# Altium PCB MSXII_Controller_Breakout.PcbDoc
Units mil, origin at the board's own origin, x right, y up, seen from the top; angles counter-clockwise.
Board outline 1377.95 x 1181.1 mil, 2 copper layers (Top Layer, Bottom Layer), stack 12.8 mil thick; 4 components, 32 nets, 109 pads, 20 vias.
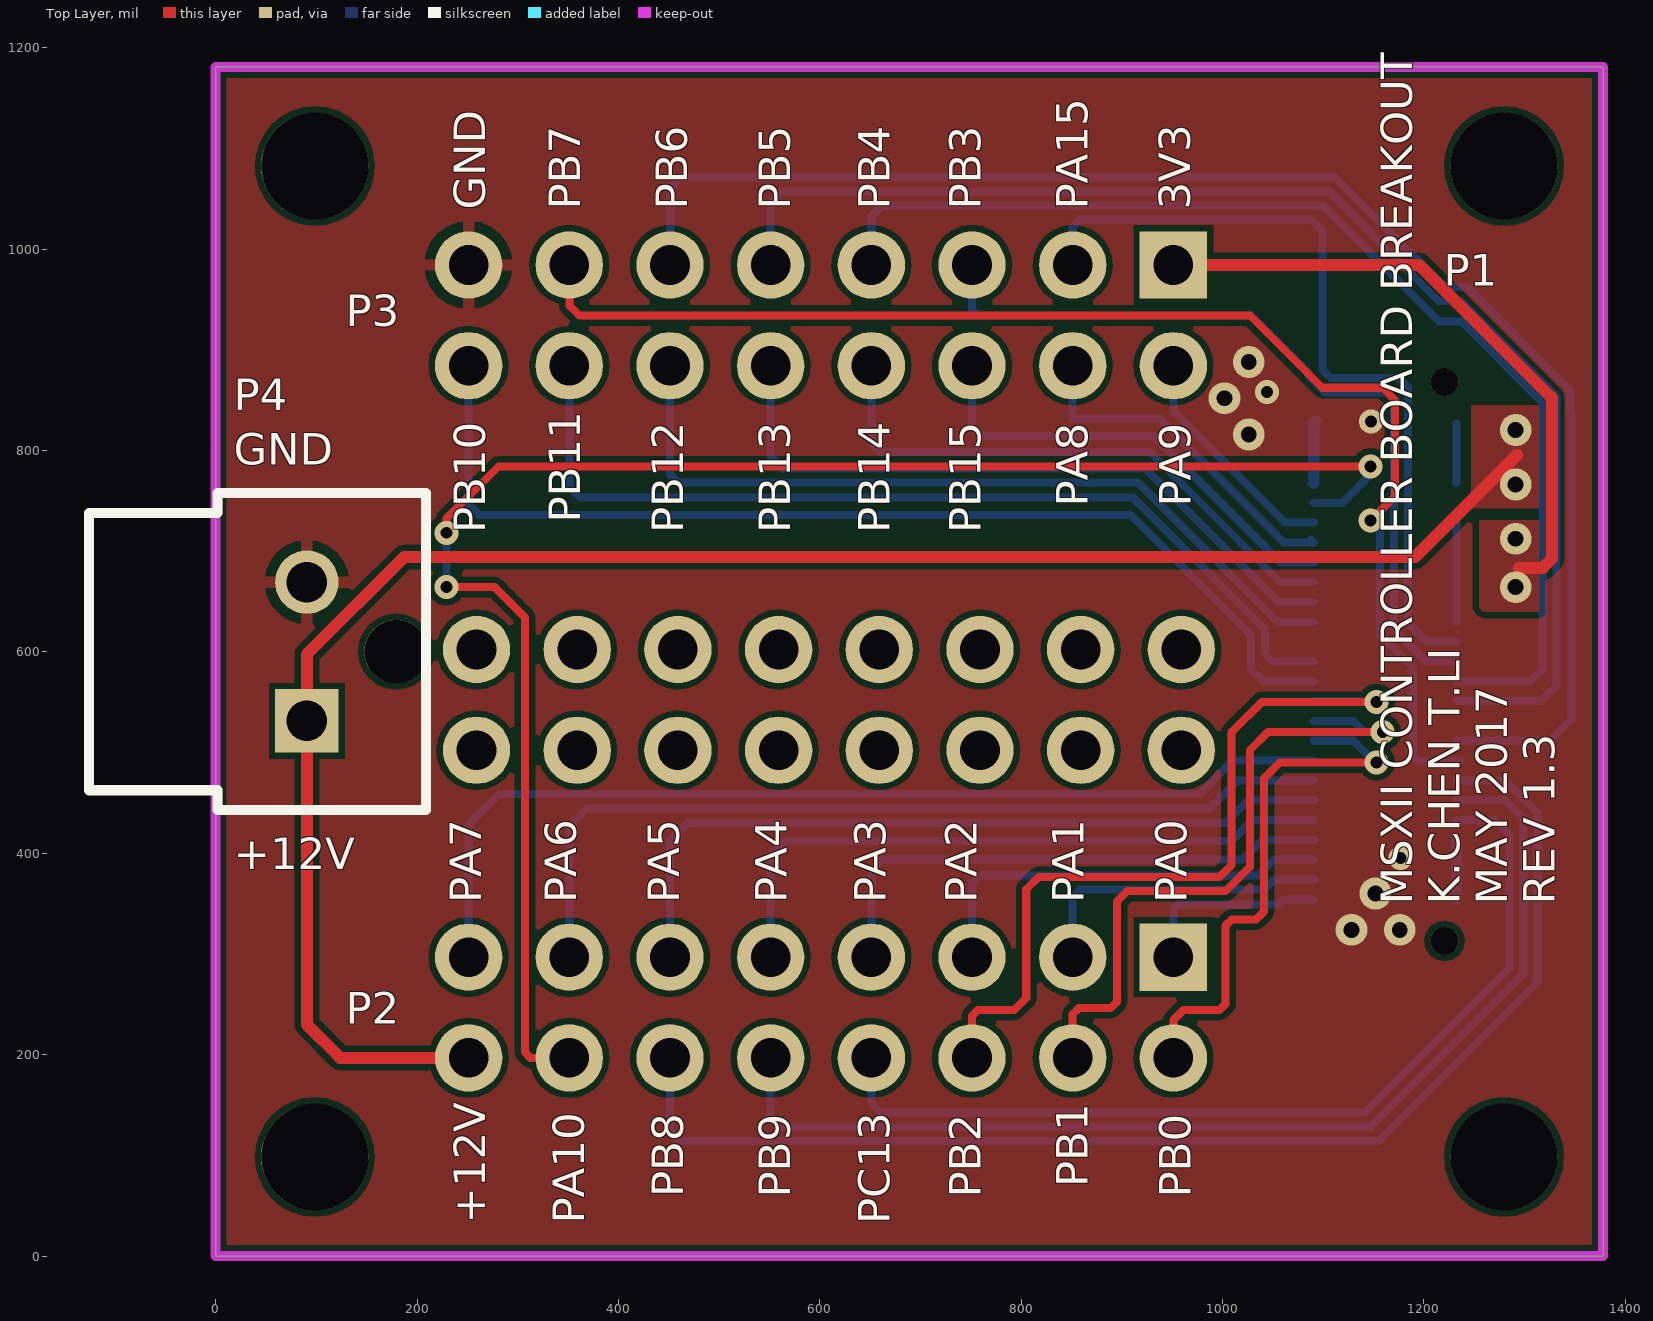
[diagram p0: Top Layer view]
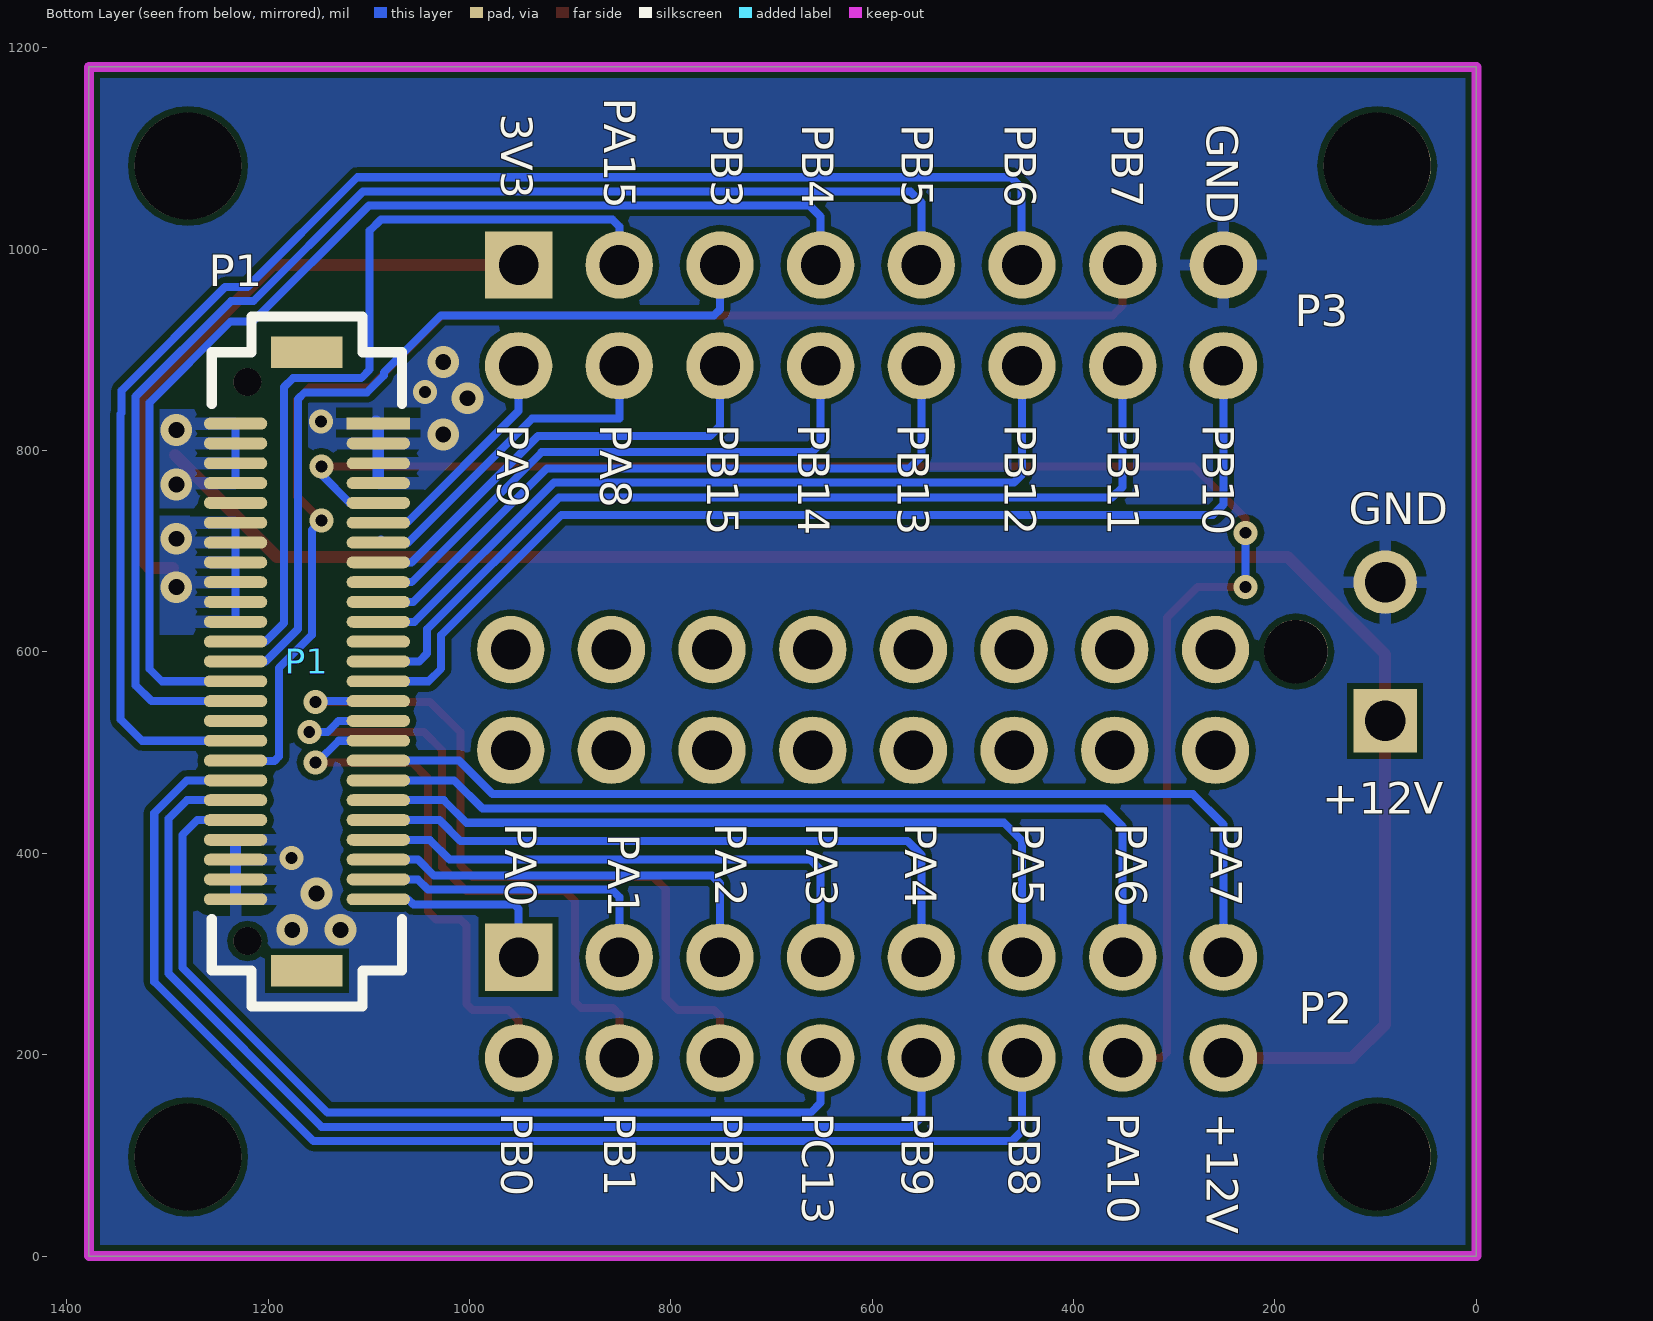
[diagram p1: Bottom Layer view, seen from below]

## Layer stack, top to bottom
Top Solder: solder mask 0.4, Solder Resist, Dk 3.5
Top Layer: signal copper 1.4
Dielectric 1: core 10, FR-4, Dk 4.2
Bottom Layer: signal copper 1.4
Bottom Solder: solder mask 0.4, Solder Resist, Dk 3.5

## Board outline
0,0 1377.95,0 1377.95,1181.1 0,1181.1

## Design rules (kind name [scope] priority, off if disabled: settings)
Clearance [All] p1: gap=6
HoleSize [All] p1: absolutevalues=TRUE maxlimit=200 minlimit=1 maxpercent=80.000 minpercent=20.000
PolygonConnect 3V3_Via_PolygonConnect [IsVia vs InNet('3V3')] p1: connectstyle=Direct reliefconductorwidth=11.81 reliefentries=4 polygonreliefangle="90 Angle" airgapwidth=10
PolygonConnect 12V_Via_PolygonConnect [IsVia vs InNet('+12V')] p2: connectstyle=Direct reliefconductorwidth=11.81 reliefentries=4 polygonreliefangle="90 Angle" airgapwidth=10
PolygonConnect GND_Via_PolygonConnect [IsVia vs InNet('GND')] p3: connectstyle=Direct reliefconductorwidth=11.81 reliefentries=4 polygonreliefangle="90 Angle" airgapwidth=10
PolygonConnect 3V3_Header_PolygonConnect [HasFootprint('CONN HEADER 8POS .100" SNGL SMD') vs InNet('3V3')] p4: connectstyle=Direct reliefconductorwidth=11.81 reliefentries=4 polygonreliefangle="90 Angle" airgapwidth=10
PolygonConnect [All] p5: connectstyle=Relief reliefconductorwidth=11.81 reliefentries=4 polygonreliefangle="90 Angle" airgapwidth=10
RoutingVias [All] p1: holewidth=11.81 width=23.81 viastyle="Through Hole" minholewidth=11.81 minwidth=23.81 maxholewidth=200 maxwidth=200
SolderMaskExpansion [All] p1: expansion=4
Width [All] p1: maxlimit=100 minlimit=6 preferedwidth=8 minimp=50.000000 maximp=50.000000 favimp=50.000000
29 further rules are at their usual default settings.

## Classes and differential pairs
component class Controller_Board_Interface: P1
component class MSXII_Controller_Breakout: P2 P3 P4

## Components (designator, comment, footprint, x,y, rotation, side; value= is the part's Value field where it differs from the comment)
P1 "BergStak Plug" "Bergstak 50 Pos Plug" 1161.42,590.55 r180 bottom locked
P2 "16POS" "16POS 0.100\" HEADER" 951.18,296.85 r180 top
P3 "16POS" "16POS 0.100\" HEADER" 951.18,984.25 r180 top
P4 "2 Position Ultra-Fit Connector" WM11673-ND 90.55,531.5 r90 top

## Footprints (in the part's own frame and the unit in brackets; to place one, negate y for a bottom-side part, rotate by r counter-clockwise, add the part's x,y. Pads: shape width x height; smd on the part's side, far side on the other; paste and mask are expansions set on the pad)
"16POS 0.100\" HEADER" [mm]
  rect 1.7x1.7 hole 1: 1(0,0)
  round 1.7 hole 1: 2(2.54,0) 3(5.08,0) 4(7.62,0) 5(10.16,0) 6(12.7,0) 7(15.24,0) 8(17.78,0) 9(17.78,2.54) 10(15.24,2.54) 11(12.7,2.54) 12(10.16,2.54) 13(7.62,2.54) 14(5.08,2.54) 15(2.54,2.54) 16(0,2.54)
"Bergstak 50 Pos Plug" [mm] "Bergstak 50 Position Plug"
  rect 1.6x0.3 smd: 1(1.8,6)
  oval 1.6x0.3 smd: 2(1.8,5.5) 3(1.8,5) 4(1.8,4.5) 5(1.8,4) 6(1.8,3.5) 7(1.8,3) 8(1.8,2.5) 9(1.8,2) 10(1.8,1.5) 11(1.8,1) 12(1.8,0.5) 13(1.8,0) 14(1.8,-0.5) 15(1.8,-1) 16(1.8,-1.5) 17(1.8,-2) 18(1.8,-2.5) 19(1.8,-3) 20(1.8,-3.5) 21(1.8,-4) 22(1.8,-4.5) 23(1.8,-5) 24(1.8,-5.5) 25(1.8,-6) 26(-1.8,-6) 27(-1.8,-5.5) 28(-1.8,-5) 29(-1.8,-4.5) 30(-1.8,-4) 31(-1.8,-3.5) 32(-1.8,-3) 33(-1.8,-2.5) 34(-1.8,-2) 35(-1.8,-1.5) 36(-1.8,-1) 37(-1.8,-0.5) 38(-1.8,0) 39(-1.8,0.5) 40(-1.8,1) 41(-1.8,1.5) 42(-1.8,2) 43(-1.8,2.5) 44(-1.8,3) 45(-1.8,3.5) 46(-1.8,4) 47(-1.8,4.5) 48(-1.8,5) 49(-1.8,5.5) 50(-1.8,6)
  round 0.7 hole 0.7: ""(-1.5,-7.05) ""(-1.5,7.05)
  rect 1.8x0.8 smd: ""(0,-7.8) ""(0,7.8)
  silkscreen extent -2.4,-8.7 2.4,8.7
WM11673-ND [mm] "2 Positions Header, Shrouded Connector 0.138\" (3.50mm) Through Hole Gold"
  rect 1.6x1.6 hole 1.02: 1(0,0)
  round 1.6 hole 1.02: 2(3.5,0)
  round 1.6 hole 1.6: ""(1.75,-2.25)
  silkscreen extent -2.25,-3 5.75,5.5, body extent -2.71,-2.85 6.29,5.82, height 13.85

## Part data
P1: library part "BergStak 50 Position Connector Plug", "50 Position Connector Plug, Outer Shroud Contacts Surface Mount Gold"
P2 P3: library part "16Pos 0.100\" Header", "CONN HEADER .100\" DUAL STR 16POS"
P4: "2 Positions Header, Shrouded Connector 0.138\" (3.50mm) Through Hole Gold"

## Free pads (board coordinates)
  round 66.93 hole 39.37: 0(259.06,502.36) 0(259.06,602.36) 0(359.06,502.36) 0(359.06,602.36) 0(459.06,502.36) 0(459.06,602.36) 0(559.06,502.36) 0(559.06,602.36) 0(659.06,502.36) 0(659.06,602.36) 0(759.06,502.36) 0(759.06,602.36) 0(859.06,502.36) 0(859.06,602.36) 0(959.06,502.36) 0(959.06,602.36)
  round 106.3 hole 106.3: ""(98.43,98.43) ""(98.43,1082.68) ""(1279.53,98.43) ""(1279.53,1082.68)

## Via types
v1: diameter 23.82, hole 11.81, Top Layer to Bottom Layer, tented both sides, 10 vias
v2: diameter 31.5, hole 15.75, Top Layer to Bottom Layer, tented both sides, 10 vias

## Nets (pads, with @x,y where several pads share a name; then routed paths per layer and width w, separated by ;. In a path a pad name is that pad's centre, name@x,y a point inside that pad or via, vN(x,y) a via of type N, cw(c..) or ccw(c..) an arc to the next point about the centre after c; other vN are vias at no path point)
3V3: P1.40 P1.41 P1.42 P1.43 P1.44 P1.45 P3.1 | length 725.2
  Top Layer w12: P3.1 1195.28,984.25 1327.06,852.47 1327.06,692.41 1318.11,683.46 1294.49,683.46
  Bottom Layer w8: P1.40 P1.41 P1.42 P1.43 P1.44 P1.45
  other v2: 1291.06,664.36 1291.06,712.36
+12V: P1.47 P1.48 P1.49 P1.50 P2.9 P4.1 | length 1885
  Top Layer w12: P2.9 123.62,196.85 90.55,229.92 P4.1 90.55,597.64 187.28,694.36 1191.21,694.36 1292.43,795.57
  Bottom Layer w8: P1.47 P1.48 P1.49 P1.50
  other v2: 1291.06,766.36 1291.06,820.36
GND: P1.1 P1.2 P1.3 P1.4 P1.26 P1.27 P1.28 P1.29 P3.8 P4.2 | length 121.5
  Bottom Layer w11: P1.26 P1.27 P1.28 P1.29
  Bottom Layer w11.81: P1.4 P1.3 P1.2 P1.1 P1.1@1092.92,829.13
  other v1: 1176.82,395.18 1147.24,828.74 1044,858
  other v2: 1128,324 1176,324 1152,360 1026,816 1002,852 1026,888
PA0: P1.25 P2.1 | length 191.3
  Bottom Layer w8: P2.1 951.18,344.88 955.42,349.12 1055.64,349.12 1060.85,354.33 P1.25
PA1: P1.24 P2.2 | length 306.3
  Bottom Layer w8: P2.2 851.18,356.49 858.65,363.95 1041.23,363.95 1051.29,374.02 P1.24
PA2/USART2_TX: P1.23 P2.3 | length 422.4
  Bottom Layer w8: P2.3 751.18,370.08 759.06,377.95 1035.43,377.95 1051.18,393.7 P1.23
PA3/USART2_RX: P1.22 P2.4 | length 538.4
  Bottom Layer w8: P2.4 651.18,383.47 661.42,393.7 1019.68,393.7 1039.37,413.39 P1.22
PA4/SPI1_NSS: P1.21 P2.5 | length 655.3
  Bottom Layer w8: P2.5 551.18,398.49 565.06,412.36 1009.06,412.36 1029.76,433.07 P1.21
PA5/SPI1_SCK: P1.20 P2.6 | length 771.7
  Bottom Layer w8: P2.6 451.18,412.49 469.06,430.36 1003.06,430.36 1025.45,452.76 P1.20
PA6/SPI1_MISO: P1.19 P2.7 | length 888
  Bottom Layer w8: P2.7 351.18,426.49 369.06,444.36 987.06,444.36 1015.13,472.44 P1.19
PA7/SPI1_MOSI: P1.18 P2.8 | length 997.4
  Bottom Layer w8: P2.8 251.18,428.49 281.59,458.9 977.06,458.9 1010.29,492.13 P1.18
PA8: P1.7 P3.15 | length 347
  Bottom Layer w8: P3.15 851.18,831.74 937.68,831.74 1060.76,708.66 P1.7 P1.7@1087.65,711.57
PA9: P1.6 P3.16 | length 230.3
  Bottom Layer w8: P3.16 951.18,839.32 1062.15,728.35 P1.6
PA10: P1.5 P2.10 | length 1680.3
  Top Layer w8: v1(229.06,664.36) 277.06,664.36 307.06,634.36 307.06,202.36 312.57,196.85 P2.10 P2.10@378.74,196.85 ; v1(229.06,718.36) 229.06,732.36 281.06,784.36 v1(1147.06,784.36)
  Bottom Layer w8: v1(229.06,664.36) v1(229.06,718.36) ; P1.5 1118.95,748.03 1147.06,776.13 v1(1147.06,784.36)
PA15: P1.39 P3.2 | length 814
  Bottom Layer w8: P3.2 851.18,1022.49 858.13,1029.43 1087.98,1029.43 1099.06,1018.36 1099.06,880.36 1107.53,871.89 1175.35,871.89 1184.25,862.99 1184.25,628.63 1202.65,610.24 P1.39
PB0: P1.17 P2.16 | length 539.9
  Top Layer w8: P2.16 951.18,234.49 961.06,244.36 997.06,244.36 1003.06,250.36 1003.06,328.36 1009.06,334.36 1033.06,334.36 1041.06,342.36 1041.06,474.36 1057.06,490.36 v1(1153.06,490.36)
  Bottom Layer w8: P1.17 1129.81,511.81 1151.26,490.36 v1(1153.06,490.36)
PB1: P1.16 P2.15 | length 666.7
  Top Layer w8: P2.15 851.18,240.16 857.48,246.46 888.98,246.46 895.06,252.54 895.06,352.36 905.06,362.36 1002.85,362.36 1027.06,386.56 1027.06,502.36 1045.06,520.36 v1(1159.06,520.36)
  Bottom Layer w8: P1.16 1129.92,531.5 1132.71,528.71 1138.27,523.15 1141.06,520.36 v1(1159.06,520.36)
PB2: P1.15 P2.14 | length 776.1
  Top Layer w8: P2.14 751.18,238.49 757.06,244.36 793.06,244.36 805.06,256.36 805.06,364.36 817.06,376.36 997.06,376.36 1009.06,388.36 1009.06,520.36 1039.06,550.36 v1(1153.06,550.36)
  Bottom Layer w8: P1.15 1152.24,551.18 v1(1153.06,550.36)
PB3: P1.38 P3.3 | length 805.5
  Bottom Layer w8: P3.3 751.18,940.24 757.06,934.36 1028.35,934.36 1085.06,877.66 1085.06,874.56 1101.73,857.89 1163.53,857.89 1170.25,851.17 1170.25,622.83 1202.54,590.55 P1.38
PB4: P1.37 P3.4 | length 1155.4
  Bottom Layer w8: P3.4 651.18,1032.49 662.13,1043.43 1099.78,1043.43 1214.85,928.36 1237.06,928.36 1317.56,847.86 1317.56,582.87 1305.56,570.87 P1.37
PB5: P1.36 P3.5 | length 1324.1
  Bottom Layer w8: P3.5 551.18,1046.49 562.13,1057.43 1105.58,1057.43 1214.65,948.36 1236.85,948.36 1331.56,853.66 1331.56,566.87 1315.87,551.18 P1.36
PB6/USART1_TX: P1.34 P3.6 | length 1512.7
  Bottom Layer w8: P3.6 451.57,984.64 451.57,1060.88 462.13,1071.43 1111.38,1071.43 1220.45,962.36 1242.65,962.36 1345.56,859.46 1345.56,837.26 1346.46,836.36 1346.46,533.07 1325.19,511.81 P1.34
PB7/USART1_RX: P1.33 P3.7 | length 1328.7
  Top Layer w8: P3.7 351.18,944.24 361.06,934.36 1027.06,934.36 1099.06,862.36 1159.06,862.36 1171.06,850.36 1171.06,754.36 v1(1147.06,730.36)
  Bottom Layer w8: v1(1147.06,730.36) 1156.25,721.17 1156.25,617.03 1189.06,584.23 1189.06,496.36 1193.67,491.75 P1.33@1235.75,491.75
PB8/I2C1_SCL: P1.32 P2.11 | length 1266
  Bottom Layer w8: P2.11 451.18,124.24 461.06,114.36 1155.06,114.36 1313.06,272.36 1313.06,440.16 1280.78,472.44 P1.32
PB9/I2C1_SDA: P1.31 P2.12 | length 1101.8
  Bottom Layer w8: P2.12 551.18,138.24 561.06,128.36 1146.85,128.36 1299.06,280.56 1299.06,434.36 1280.66,452.76 P1.31
PB10/USART3_TX/I2C2_SCL: P1.14 P3.9 | length 1069.5
  Bottom Layer w8: P3.9 251.18,746.46 261.42,736.22 908.6,736.22 1028.06,616.76 1028.06,583.36 1040.55,570.87 P1.14
PB11/USART3_RX/I2C2_SDA: P1.13 P3.10 | length 945.7
  Bottom Layer w8: P3.10 351.18,763.94 361.65,753.46 911.15,753.46 1042.06,622.56 1042.06,598.36 1049.87,590.55 P1.13
PB12/SPI2_NSS: P1.11 P3.11 | length 808
  Bottom Layer w8: P3.11 451.18,776.21 459.03,768.36 916.06,768.36 1054.5,629.92 P1.11
PB13/SPI2_SCK: P1.10 P3.12 | length 689.3
  Bottom Layer w8: P3.12 551.18,794.29 563.11,782.36 923.06,782.36 1055.81,649.61 P1.10
PB14/SPI2_MISO: P1.9 P3.13 | length 573.7
  Bottom Layer w8: P3.13 651.18,806.89 659.71,798.36 928.26,798.36 1057.33,669.29 P1.9
PB15/SPI2_MOSI: P1.8 P3.14 | length 455.4
  Bottom Layer w8: P3.14 751.18,824.24 761.06,814.36 932.06,814.36 1057.44,688.98 P1.8
PC13: P1.30 P2.13 | length 933.1
  Bottom Layer w8: P2.13 651.18,152.24 661.06,142.36 1141.06,142.36 1285.06,286.36 1285.06,418.36 1270.35,433.07 P1.30
pads on no net: P1. P1.12 P1.35 P1.46 P4.

## Polygon pours and split planes (outlines as drawn)
3V3 on Top Layer "3V3_L01_P040" (solid, remove dead copper, pour order 40): 1255.12,730.71 1314.17,730.71 1314.17,640.16 1259.06,640.16 1255.12,644.09
+12V on Top Layer "+12V_L01_P034" (solid, remove dead copper, pour order 34): 1247.24,844.88 1314.17,844.88 1314.17,742.52 1247.24,742.52
GND on Top Layer "GND_L01_P042" (solid, remove dead copper, pour order 42): 7.09,1175.59 7.09,6.3 1373.23,6.3 1373.23,1175.59
3V3 on Bottom Layer "3V3_L02_P038" (solid, remove dead copper, pour order 38): 1186.14,735.04 1309.06,735.04 1309.06,616.93 1197.95,616.93 1186.14,628.74
+12V on Bottom Layer "+12V_L02_P036" (solid, remove dead copper, pour order 36): 1172.44,840.94 1172.44,742.52 1309.06,742.52 1309.06,840.94
GND on Bottom Layer "GND_L02_P044" (solid, remove dead copper, pour order 44): 7.09,1175.59 7.09,6.3 1373.23,6.3 1373.23,1175.59

## Keep-outs
Keep-Out Layer:
  lines w10: 0,0 0,1181.1 1377.9,1181.1 1378,1181 1378,0 0,0

## Silkscreen, mask and mechanical layers (free items; w line width, h text height)
Top Overlay:
  text "GND" at 267.72,1039.37 h31.5 r90
  text "PB7" at 362.2,1039.37 h31.5 r90
  text "PB6" at 468.5,1039.37 h31.5 r90
  text "PB5" at 570.87,1039.37 h31.5 r90
  text "PB4" at 669.29,1039.37 h31.5 r90
  text "PB3" at 759.84,1039.37 h31.5 r90
  text "PA15" at 866.14,1039.37 h31.5 r90
  text "3V3" at 967.72,1039.37 h31.5 r90
  text "GND" at 18,786 h31.5
  text "PA8" at 866.14,744.09 h31.5 r90
  text "PA9" at 968.5,744.09 h31.5 r90
  text "PB11" at 362.2,728.35 h31.5 r90
  text "PB10" at 267.72,717.86 h31.5 r90
  text "PB12" at 464.57,717.86 h31.5 r90
  text "PB13" at 570.87,717.86 h31.5 r90
  text "PB14" at 669.29,717.86 h31.5 r90
  text "PB15" at 759.84,717.86 h31.5 r90
  text "+12V" at 18,384 h31.5
  text "PA7" at 263.78,350.39 h31.5 r90
  text "PA6" at 358.27,350.39 h31.5 r90
  text "PA5" at 460.63,350.39 h31.5 r90
  text "PA4" at 566.93,350.39 h31.5 r90
  text "PA3" at 665.35,350.39 h31.5 r90
  text "PA2" at 755.91,350.39 h31.5 r90
  text "PA1" at 862.2,350.39 h31.5 r90
  text "PA0" at 964.57,350.39 h31.5 r90
  text "MSXII CONTROLLER BOARD BREAKOUT / K.CHEN T.LI / MAY 2017 / REV 1.3" at 1329.92,348.82 h31.5 r90
  text "PB1" at 866.14,68.23 h31.5 r90
  text "PB8" at 464.57,58.56 h31.5 r90
  text "PB9" at 570.87,57.73 h31.5 r90
  text "PB2" at 759.84,57.73 h31.5 r90
  text "PB0" at 968.5,57.73 h31.5 r90
  text "+12V" at 267.72,32.32 h31.5 r90
  text "PA10" at 366.14,32.32 h31.5 r90
  text "PC13" at 669.29,31.5 h31.5 r90
Bottom Overlay:
  text "PA15" at 866.14,1150.39 h31.5 r90
  text "3V3" at 968.5,1134.65 h31.5 r90
  text "GND" at 267.72,1124.16 h31.5 r90
  text "PB7" at 362.2,1124.16 h31.5 r90
  text "PB6" at 468.5,1124.16 h31.5 r90
  text "PB5" at 570.87,1124.16 h31.5 r90
  text "PB4" at 669.29,1124.16 h31.5 r90
  text "PB3" at 759.84,1124.16 h31.5 r90
  text "P1" at 1259.06,962.99 h31.5
  text "P3" at 180.31,923.62 h31.5
  text "PB10" at 271.65,826.24 h31.5 r90
  text "PB11" at 366.14,826.24 h31.5 r90
  text "PB12" at 468.5,826.24 h31.5 r90
  text "PB13" at 574.8,826.24 h31.5 r90
  text "PB14" at 673.23,826.24 h31.5 r90
  text "PB15" at 763.78,826.24 h31.5 r90
  text "PA8" at 870.08,826.24 h31.5 r90
  text "PA9" at 972.44,826.24 h31.5 r90
  text "GND" at 126.52,726.77 h31.5
  text "+12V" at 152.76,439.37 h31.5
  text "PA7" at 263.78,429.92 h31.5 r90
  text "PA6" at 358.27,429.92 h31.5 r90
  text "PA5" at 460.63,429.92 h31.5 r90
  text "PA4" at 566.93,429.92 h31.5 r90
  text "PA3" at 665.35,429.92 h31.5 r90
  text "PA2" at 755.91,429.92 h31.5 r90
  text "PA0" at 964.57,429.92 h31.5 r90
  text "PA1" at 862.2,419.43 h31.5 r90
  text "P2" at 176.38,230.71 h31.5
  text "+12V" at 267.72,142.52 h31.5 r90
  text "PA10" at 366.14,142.52 h31.5 r90
  text "PB8" at 464.57,142.52 h31.5 r90
  text "PB9" at 570.87,142.52 h31.5 r90
  text "PC13" at 669.29,142.52 h31.5 r90
  text "PB2" at 759.84,142.52 h31.5 r90
  text "PB1" at 866.14,142.52 h31.5 r90
  text "PB0" at 968.5,142.52 h31.5 r90